# EAGLE board mainboard (EAGLE 5.06)
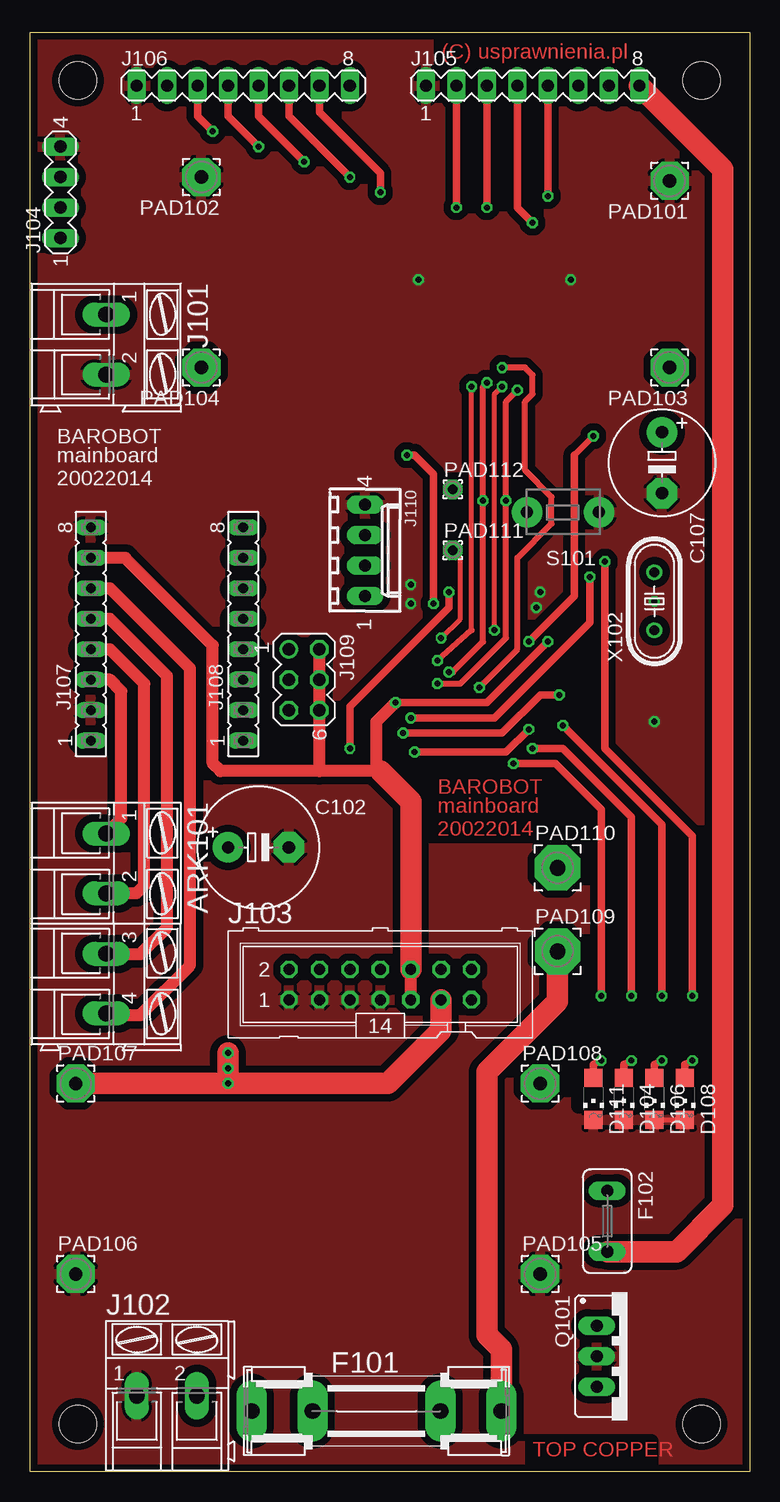
[diagram p0: board, top side]
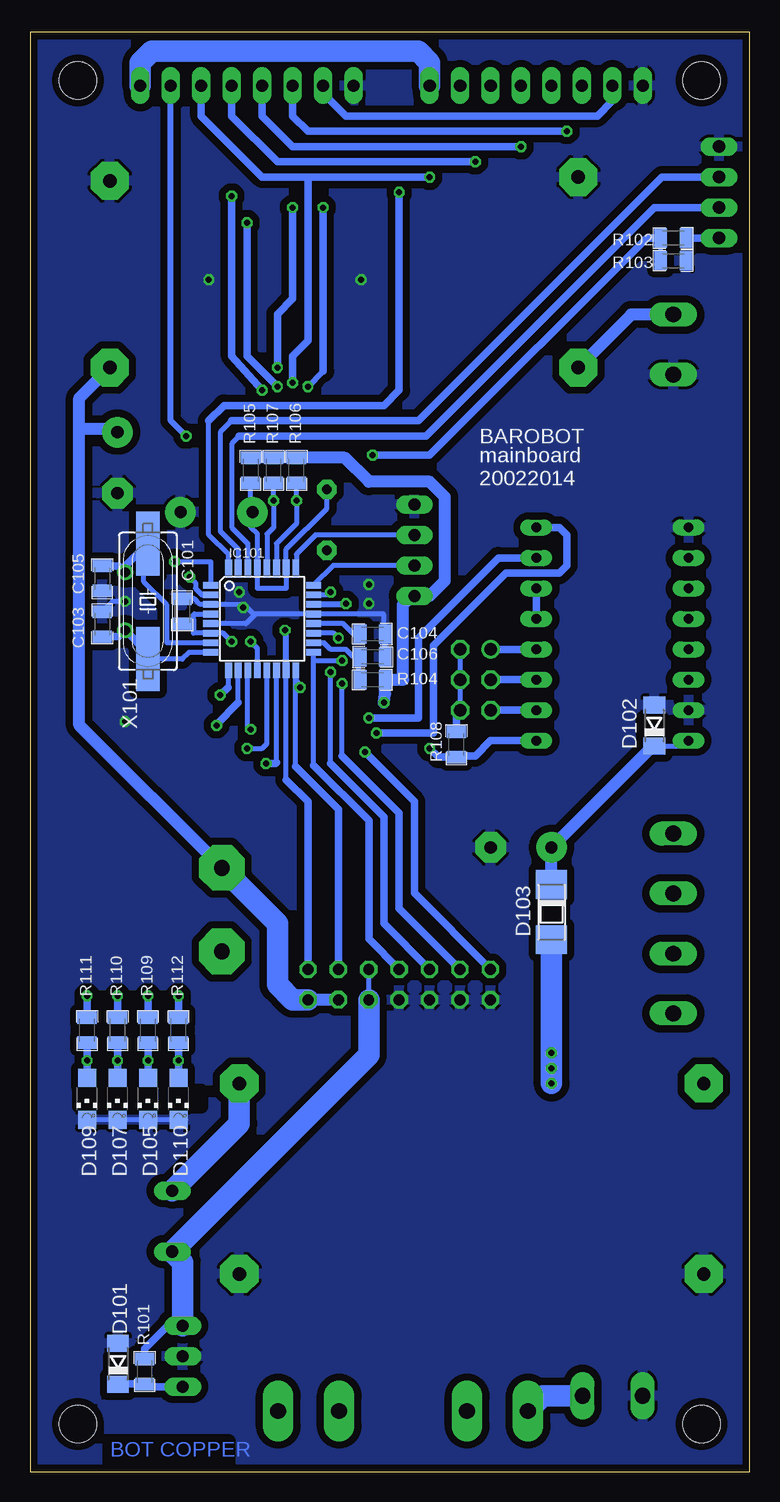
[diagram p1: board, bottom side, seen from below]

Size 60 x 120 mm. Coordinates in mm from the lower left corner, seen from the top.
Outline: 0,0 0,120 60,120 60,0 0,0
Copper layers (1*16): Top 0.035mm / dielectric 1.5mm / Bottom 0.035mm
Design rules "default *": minimum track width 10mil, minimum drill 0.5mm, track to track 8mil, track to pad 8mil, pad to pad 8mil, via to via 8mil, smd to smd 8mil, copper to edge 20mil, drill to drill 8mil, minimum pad ring 10mil, minimum via ring 8mil, stop-mask expansion 4mil, vias tented up to drill 0mil, thermal gap 10mil
Holes 3.1 mm at 4,4 56,4 56,116 4,116
tRestrict: area 45.7,30.5 to 55.9,31.8
bRestrict: area 45.7,30.5 to 55.9,31.8; area 7.3,61.6 to 8.9,62.9; area 15.6,46 to 17.8,47.3; area 52,8.7 to 53.3,9.7

## Footprints (pad centres in the part's own frame; a part is rotated, then mirrored left to right if it is on the bottom)
AK300/4 = drill 1.321 long: 1 -7.493,0; 2 -2.515,0; 3 2.515,0; 4 7.493,0
0805 = smd 1.044 x 1.6: 1 -1.048,0; 2 1.048,0
E5-10,5 = drill 1.016 pad 2.54 round: + -2.54,0 | drill 1.016 pad 2.54 octagon: - 2.54,0
E5-8,5 = drill 1.016 pad 2.54 round: + -2.54,0 | drill 1.016 pad 2.54 octagon: - 2.54,0
SOD80C = smd 1.4 x 1.8: A 1.7,0; C -1.7,0
SOD106A = smd 2.4 x 2.6: A 2.3,0; K -2.3,0
CHIPLED_1206 = smd 1.5 x 1.5: A 0,-1.75; C 0,1.75
SHK20L = drill 1.321 pad 2.54 long: 1A -10.414,0; 1B -5.334,0; 2A 10.414,0; 2B 5.334,0
TE5 = drill 1.016 long: 1 -2.54,0; 2 2.54,0
TQFP32-08 = smd 1.27 x 0.559: 1 -4.293,2.8; 2 -4.293,2; 3 -4.293,1.2; 4 -4.293,0.4; 5 -4.293,-0.4; 6 -4.293,-1.2; 7 -4.293,-2; 8 -4.293,-2.8; 17 4.293,-2.8; 18 4.293,-2; 19 4.293,-1.2; 20 4.293,-0.4; 21 4.293,0.4; 22 4.293,1.2; 23 4.293,2; 24 4.293,2.8 | smd 0.559 x 1.27: 9 -2.8,-4.293; 10 -2,-4.293; 11 -1.2,-4.293; 12 -0.4,-4.293; 13 0.4,-4.293; 14 1.2,-4.293; 15 2,-4.293; 16 2.8,-4.293; 25 2.8,4.293; 26 2,4.293; 27 1.2,4.293; 28 0.4,4.293; 29 -0.4,4.293; 30 -1.2,4.293; 31 -2,4.293; 32 -2.8,4.293
AK300/2 = drill 1.321 long: 1 -2.515,0; 2 2.489,0
ML14 = drill 0.914 octagon: 1 -7.62,-1.27; 2 -7.62,1.27; 3 -5.08,-1.27; 4 -5.08,1.27; 5 -2.54,-1.27; 6 -2.54,1.27; 7 0,-1.27; 8 0,1.27; 9 2.54,-1.27; 10 2.54,1.27; 11 5.08,-1.27; 12 5.08,1.27; 13 7.62,-1.27; 14 7.62,1.27
MA04-1 = drill 1.016 long: 1 -3.81,0; 2 -1.27,0; 3 1.27,0; 4 3.81,0
MA08-1 = drill 1.016 long: 1 -8.89,0; 2 -6.35,0; 3 -3.81,0; 4 -1.27,0; 5 1.27,0; 6 3.81,0; 7 6.35,0; 8 8.89,0
FE08 = drill 0.813 long: 1 -8.89,0; 2 -6.35,0; 3 -3.81,0; 4 -1.27,0; 5 1.27,0; 6 3.81,0; 7 6.35,0; 8 8.89,0
MA03-2 = drill 1.016 round: 1 -2.54,-1.27 | drill 1.016 octagon: 2 -2.54,1.27; 3 0,-1.27; 4 0,1.27; 5 2.54,-1.27; 6 2.54,1.27
6410-04 = drill 1.016 long: 1 3.81,0; 2 1.27,0; 3 -1.27,0; 4 -3.81,0
3,17/1,1 = drill 1.118 pad 3.175 octagon: 1 0,0
3,81/1,3 = drill 1.321 pad 3.81 octagon: 1 0,0
1,6/0,8 = drill 0.813 pad 1.6 octagon: 1 0,0
TO220CS = drill 1.016 long: A 0,-2.54; C -2.54,-2.54; G 2.54,-2.54
NSWITCH = drill 1.016 pad 2.54 round: 1 -3,0; 2 3,0
HC49UP = smd 5.334 x 1.93: 1 -4.826,0; 2 4.826,0
HC49/S = drill 0.813 round: 1 -2.413,0; 2 2.413,0

## Placement (x,y rotation side)
ARK101  [AK300/4]  6.35,45.72 270 top
C101  100n  [0805]  47.31,71.75 270 bottom
C102  100uF  [E5-10,5]  19.05,52.07 0 top
C103  27p  [0805]  53.98,70.67 270 bottom
C104  100n  [0805]  31.43,69.85 180 bottom
C105  27p  [0805]  53.98,74.48 90 bottom
C106  100n  [0805]  31.43,67.94 0 bottom
C107  [E5-8,5]  52.7,84.14 270 top
D101  C5V6  [SOD80C]  52.66,9.02 90 bottom
D102  C16  [SOD80C]  7.94,62.23 90 bottom
D103  SS34  [SOD106A]  16.51,46.67 270 bottom
D104  YELLOW  [CHIPLED_1206]  49.53,31.11 180 top
D105  YELLOW  [CHIPLED_1206]  50.16,31.11 180 bottom
D106  GREEN  [CHIPLED_1206]  52.07,31.11 180 top
D107  GREEN  [CHIPLED_1206]  52.7,31.11 180 bottom
D108  WHITE  [CHIPLED_1206]  54.61,31.11 180 top
D109  WHITE  [CHIPLED_1206]  55.24,31.11 180 bottom
D110  RED  [CHIPLED_1206]  47.62,31.11 180 bottom
D111  RED  [CHIPLED_1206]  46.99,31.11 180 top
F101  FUSESHK20L  [SHK20L]  28.89,5.08 0 top
F102  [TE5]  48.13,20.91 270 top
IC101  ATMEGA328  [TQFP32-08]  40.64,71.12 0 bottom
J101  [AK300/2]  6.35,93.98 270 top
J102  [AK300/2]  11.43,6.35 0 top
J103  [ML14]  29.21,40.64 0 top
J104  [MA04-1]  2.54,106.68 90 top
J105  [MA08-1]  41.91,115.57 0 top
J106  [MA08-1]  17.78,115.57 0 top
J107  [FE08]  5.08,69.85 90 top
J108  [FE08]  17.78,69.85 90 top
J109  [MA03-2]  22.86,66.04 270 top
J110  22-27-2041-04  [6410-04]  27.94,76.83 270 top
PAD101  [3,17/1,1]  53.34,107.63 180 top
PAD102  [3,17/1,1]  14.29,107.95 180 top
PAD103  [3,17/1,1]  53.34,92.08 180 top
PAD104  [3,17/1,1]  14.29,92.08 180 top
PAD105  [3,17/1,1]  42.55,16.51 0 top
PAD106  [3,17/1,1]  3.81,16.51 0 top
PAD107  [3,17/1,1]  3.81,32.38 0 top
PAD108  [3,17/1,1]  42.55,32.38 0 top
PAD109  [3,81/1,3]  44,43.4 0 top
PAD110  [3,81/1,3]  44,50.36 0 top
PAD111  [1,6/0,8]  35.24,76.83 0 top
PAD112  [1,6/0,8]  35.24,81.92 0 top
Q101  BTW58  [TO220CS]  49.8,9.65 270 top
R101  1k  [0805]  50.44,8.38 90 bottom
R102  8k2  [0805]  6.35,102.87 180 bottom
R103  8k2  [0805]  6.35,100.97 180 bottom
R104  82R  [0805]  31.43,66.04 180 bottom
R105  8k2  [0805]  41.59,83.5 90 bottom
R106  8k2  [0805]  37.78,83.5 90 bottom
R107  8k2  [0805]  39.69,83.5 90 bottom
R108  8k2  [0805]  24.45,60.64 90 bottom
R109  470R  [0805]  50.16,36.83 90 bottom
R110  470R  [0805]  52.7,36.83 90 bottom
R111  470R  [0805]  55.24,36.83 90 bottom
R112  470R  [0805]  47.62,36.83 90 bottom
S101  [NSWITCH]  44.45,80.01 180 top
X101  16MHz  [HC49UP]  50.16,72.58 90 bottom
X102  16MHz  [HC49/S]  52.07,72.58 90 top

## Library data of the parts
ARK101 J101 J102 = con-ptr500
C101 C103-C106 R101-R112 = barobot
C102 C107 = rcl
D101 D102 = diode
D103 = telefunken
D104-D111 = led
F101 F102 = fuse
IC101 = atmel
J103 = con-ml
J104-J106 J109 = con-lstb
J107 J108 = con-lsta
J110 = con-molex
PAD101-PAD112 = wirepad
Q101 = triac
S101 = aaaa
X101 X102 = crystal

## Nets
+12V: C107.+ D103.A J103.11 J103.13 PAD103.1 PAD107.1 PAD110.1
CARRET_RESET: IC101.11 J103.2
GND: C101.1 C102.- C103.1 C104.1 C105.1 C106.2 C107.- D101.A D102.A D104.C D105.C D106.C D107.C D108.C D109.C D110.C D111.C IC101.3 IC101.5 IC101.21 J101.2 J102.1 J103.1 J103.3 J103.5 J103.7 J104.4 J105.1 J106.1 J107.2 J107.8 J110.4 PAD101.1 PAD102.1 PAD105.1 PAD106.1 Q101.A R103.1 S101.1
JUMPER101: IC101.23 J108.1 R108.1
MISO: IC101.16 J103.12 J105.3 J106.3
MOSI: IC101.15 J103.14 J105.4 J106.4
N$1: F101.2A PAD109.1
N$2: IC101.24 J110.2
N$3: IC101.12 J105.7
N$4: IC101.30 J104.2
N$5: IC101.31 J104.3
N$6: J101.1 PAD104.1
N$7: J104.1 R102.1
N$8: IC101.1 R111.2
N$9: IC101.10 R110.2
N$10: IC101.13 R109.2
N$11: IC101.14 R112.2
N$12: D110.A D111.A R112.1
N$13: D108.A D109.A R111.1
N$14: IC101.25 J110.3
N$15: D104.A D105.A R109.1
N$16: F101.1A J102.2
N$17: ARK101.1 J107.3
N$18: ARK101.2 J107.4
N$19: ARK101.3 J107.5
N$20: ARK101.4 J107.6
N$21: IC101.19 PAD111.1
N$24: J108.5 J108.6
N$25: IC101.2 J108.7
N$26: IC101.9 J108.8
N$27: C105.2 IC101.7 X101.2 X102.2
N$28: IC101.26 IC101.29 PAD112.1 R105.1 S101.2
N$35: J108.2 J109.5
N$37: IC101.22 R102.2 R103.2
N$38: IC101.32 J106.7
N$39: J108.3 J109.3
N$40: J108.4 J109.1
N$41: C103.2 IC101.8 X101.1 X102.1
N$42: C104.2 IC101.20
N$43: C102.+ D102.C D103.K J107.1
N$45: C106.1 IC101.18 R104.2
N$47: D101.C Q101.G R101.1
N$48: F102.1 PAD108.1
R103: D106.A D107.A R110.1
SCK: IC101.17 J103.8 J105.2 J106.2
SCL: IC101.28 J103.4 J105.5 J106.5 R107.1
SDA: IC101.27 J103.6 J105.6 J106.6 R106.1
VCC: C101.2 F102.2 IC101.4 IC101.6 J103.9 J103.10 J105.8 J106.8 J107.7 J109.2 J109.4 J109.6 J110.1 Q101.C R101.2 R104.1 R105.2 R106.2 R107.2 R108.2

## Tracks (layer width: path | path; a pad name or v marks a point on that pad's centre or on a via)
+12V  (via drill 0.5)
  Top 1.778: J103.11 34.29,36.83 29.84,32.38 v16.51,32.38 | PAD107.1 v16.51,32.38 | v16.51,32.38 v16.51,33.66 16.51,34.29 v16.51,34.92
  Bottom 1.016: J103.11 J103.13 | 55.88,87 55.88,89.53 PAD103.1 | C107.+ 53.02,87 55.88,87 | 55.88,87 55.88,62.24 PAD110.1 | PAD110.1
  Bottom 1.778: v16.51,32.38 D103.A | J103.13 38.1,39.37 39.37,40.64 39.37,45.73 PAD110.1
CARRET_RESET  (via drill 0.5)
  Top 0.61: v41.59,61.91 39.69,60.01 v32.07,60.01
  Bottom 0.406: IC101.11 41.84,62.16 v41.59,61.91
  Bottom 0.61: J103.2 27.94,48.26 27.94,55.88 v32.07,60.01
GND  (via drill 0.5)
  Top 0.406: v52.07,72.58 51.75,72.58 | D106.C D108.C
  Bottom 0.406: IC101.5 41.99,70.72 41.27,71.44 | 41.27,71.44 41.19,71.52 IC101.21 30.56,71.52 30.48,71.44 30.48,69.94 C104.1 | 41.27,71.44 42.16,72.32 IC101.3 45.81,72.32 46.29,72.8 C101.1 | C106.2 C104.1 | C104.1 | C103.1 53.12,72.58 v52.07,72.58 | D109.C D107.C D105.C | D110.C D104.C | D104.C D105.C | D110.C D111.C D110.C | D104.C D105.C
  other vias: 42.55,73.34 32.38,99.38 42.23,72.07 31.75,73.98 31.75,72.39 52.07,62.55 45.09,99.38
  pour Top (isolate 0.61): 0,119.38 59.69,119.38 59.69,0 0,0
  pour Bottom (isolate 0.61): 0,119.38 59.69,119.38 59.69,0 0,0
JUMPER101  (via drill 0.5)
  Top 0.61: v34.92,73.34 34.92,72.07 26.67,63.82 v26.67,60.33
  Bottom 0.406: IC101.23 34.92,73.12 v34.92,73.34
  Bottom 0.61: J108.1 21.59,60.96 22.86,59.69 24.35,59.69 R108.1 25.94,59.59 v26.67,60.33
MISO  (via drill 0.5)
  Top 0.508: v37.47,65.41 40.64,68.58 40.64,76.2 43.5,79.06 43.5,81.28 41.27,83.5 41.27,89.22 41.91,89.85 41.91,91.44 41.27,92.08 v39.37,92.08
  Top 0.61: J106.3 13.97,113.03 v15.24,111.76 | v38.1,105.41 J105.3
  Bottom 0.406: 37.84,58.8 IC101.16
  Bottom 0.508: IC101.16 37.84,66.1 v37.47,65.41
  Bottom 0.61: J103.12 34.29,55.24 37.84,58.8 | J105.3 38.1,113.03 36.83,111.76 v15.24,111.76 | v39.37,92.08 39.37,96.52 38.1,97.79 v38.1,105.41
MOSI  (via drill 0.5)
  Top 0.406: v38.73,70.17 38.73,89.85 v39.37,90.49
  Top 0.61: J106.4 16.51,113.03 v19.05,110.49 | v41.91,104.14 40.64,105.41 J105.4
  Bottom 0.406: 38.64,57.69 IC101.15
  Bottom 0.508: IC101.15 38.64,70.07 v38.73,70.17
  Bottom 0.61: 38.64,57.69 36.83,55.88 36.83,44.45 J103.14 | J105.4 40.64,113.03 38.1,110.49 v19.05,110.49 | v39.37,90.49 41.91,93.03 v41.91,104.14
N$1
  Top 1.778: F101.2A 39.31,10.22 38.1,11.43 38.1,33.34 43.99,39.23 PAD109.1
N$2
  Bottom 0.406: IC101.24 34.7,75.56 J110.2
N$3  (via drill 0.5)
  Top 0.508: 45.4,84.77 v46.99,86.36
  Top 0.61: v41.59,69.22 45.4,73.03 45.4,75.56 45.4,84.77
  Bottom 0.406: v41.59,69.22 41.04,68.66 IC101.12
  Bottom 0.508: J105.7 48.26,87.63 v46.99,86.36
N$4
  Bottom 0.406: IC101.30 41.84,77.4 43.18,78.74 43.18,85.72 42.55,86.36
  Bottom 0.61: 42.55,86.36 28.26,86.36 26.99,86.36 7.94,105.41 J104.2
N$5
  Bottom 0.406: 43.18,87.63 44.13,86.68 44.13,78.42 42.64,76.93 IC101.31
  Bottom 0.61: J104.3 7.3,107.95 27.62,87.63 43.18,87.63
N$6
  Bottom 1.016: PAD104.1 9.87,96.5 J101.1
  Bottom 1.27: PAD104.1 13.65,92.71
N$7
  Bottom 0.406: 5.08,102.87 R102.1
  Bottom 0.61: J104.1 5.08,102.87
N$8  (via drill 0.5)
  Top 0.61: v47.94,75.88 47.94,60.33 55.24,53.02 v55.24,39.69
  Bottom 0.406: 44.93,73.98 IC101.1 44.93,75.88 v47.94,75.88
  Bottom 0.61: R111.2 v55.24,39.69
N$9  (via drill 0.5)
  Top 0.61: v44.45,62.23 52.7,53.98 v52.7,39.69
  Bottom 0.406: 42.64,64.14 IC101.10
  Bottom 0.61: 42.64,64.14 44.45,62.33 v44.45,62.23 | R110.2 v52.7,39.69
N$10  (via drill 0.5)
  Top 0.61: v41.91,60.33 44.45,60.33 50.16,54.61 v50.16,39.69
  Bottom 0.406: IC101.13 40.24,60.73 40.64,60.33 v41.91,60.33
  Bottom 0.61: R109.2 v50.16,39.69
N$11  (via drill 0.5)
  Top 0.61: v47.62,39.69 47.62,49.85 | 47.62,49.85 47.62,50.16 | v40.32,59.05 43.81,59.05 47.62,55.24 47.62,49.85
  Bottom 0.406: 39.44,59.12 IC101.14
  Bottom 0.61: R112.2 v47.62,39.69 | 39.44,59.12 39.51,59.05 v40.32,59.05
N$12  (via drill 0.5)
  Top 0.61: v47.62,34.29 46.99,33.97 D111.A
  Bottom 0.61: R112.1 v47.62,34.29 D110.A
N$13  (via drill 0.5)
  Top 0.61: v55.24,34.29 54.61,33.97 D108.A
  Bottom 0.61: R111.1 v55.24,34.29 D109.A
N$14
  Bottom 0.406: J110.3 36.2,78.11 37.78,76.52 37.78,75.47 IC101.25
N$15  (via drill 0.5)
  Top 0.61: v50.16,34.29 49.53,33.97 D104.A
  Bottom 0.61: R109.1 v50.16,34.29 D105.A
N$16
  Bottom 1.778: J102.2 17.21,6.35 F101.1A
N$17
  Top 1.016: ARK101.1 7.62,54.48 7.62,65.09 6.67,66.04 J107.3
N$18
  Top 1.016: J107.4 6.67,68.58 9.53,65.72 9.53,48.9 8.89,48.26 6.38,48.26 ARK101.2
N$19
  Top 1.016: J107.5 6.67,71.12 11.43,66.36 11.43,45.4 9.21,43.18 6.38,43.18 ARK101.3
N$20
  Top 1.016: J107.6 6.67,73.66 13.34,66.99 13.34,42.23 9.21,38.1 6.22,38.1 | 6.22,38.1 5.71,38.1 | ARK101.4 6.22,38.1
N$21  (via drill 0.5)
  Top 0.406: v34.29,69.53 35.88,71.12 35.88,76.2 PAD111.1
  Bottom 0.406: IC101.19 34.68,69.92 v34.29,69.53
N$24
  Bottom 0.61: J108.5 J108.6
N$25  (via drill 0.5)
  Top 0.61: v31.75,62.87 38.73,62.87 46.67,70.8 v46.67,74.61
  Bottom 0.406: IC101.2 45.66,73.12 46.2,73.66 46.2,74.14 v46.67,74.61
  Bottom 0.61: v31.75,62.87 27.62,62.87 27.62,69.53 20.95,76.2 J108.7
N$26  (via drill 0.5)
  Top 0.61: v44.13,64.77 42.55,64.77 39.37,61.59 v31.11,61.59
  Bottom 0.406: IC101.9 43.44,65.46 43.5,65.41 43.81,65.09
  Bottom 0.61: v31.11,61.59 26.35,61.59 26.35,68.9 20.32,74.93 15.88,74.93 15.24,75.56 15.24,78.11 15.88,78.74 J108.8 | v44.13,64.77 43.5,65.41
N$27
  Bottom 0.406: 52.61,75.53 52.45,75.37 52.2,75.37 | X101.2 50.51,77.06 50.51,74.2 48.58,72.26 48.58,69.12 IC101.7
  Bottom 0.61: 52.45,75.37 X102.2 | 52.61,75.53 C105.2 | 50.51,77.06 52.2,75.37
N$28
  Bottom 0.406: 41.59,80.01 41.59,78.74 41.04,78.19 IC101.29 41.04,73.66 38.64,73.66 IC101.26 38.64,76.93 35.24,80.33 PAD112.1 | 41.59,80.01 R105.1 | 41.59,80.01 S101.2
N$35
  Bottom 0.61: J108.2 J109.5
N$37  (via drill 0.5)
  Top 0.61: v31.43,84.77 32.07,84.77 33.66,83.19 v33.66,72.39
  Bottom 0.406: R103.2 R102.2
  Bottom 0.508: IC101.22 34.04,72.32 v33.66,72.39
  Bottom 0.61: v31.43,84.77 26.67,84.77 8.57,102.87 R102.2
N$38  (via drill 0.5)
  Top 0.61: J106.7 24.13,113.35 29.21,108.27 v29.21,106.68
  Bottom 0.406: IC101.32 43.44,76.46 45.09,78.11 45.09,87.63
  Bottom 0.61: 45.09,87.63 43.81,88.9 30.48,88.9 29.21,90.17 v29.21,106.68
N$39
  Bottom 0.61: J108.3 J109.3
N$40
  Bottom 0.61: J108.4 J109.1
N$41
  Bottom 0.406: 49.85,68.45 49.85,68.07 X101.1 | X101.1 50.16,68.26 50.26,68.36 50.16,68.45 | X102.1 52.61,69.63 | IC101.8 46.73,68.32 47.3,67.75 X101.1
  Bottom 0.61: 50.26,68.36 X102.1 | 52.61,69.63 C103.2
N$42
  Bottom 0.406: IC101.20 33.89,70.72 33.02,69.85 C104.2
N$43
  Bottom 0.406: J107.1 5.51,60.53 D102.C
  Bottom 1.016: D103.K C102.+ 8.05,60.53 D102.C
N$45
  Bottom 0.406: R104.2 32.8,67.94 C106.1 33.02,67.94 33.66,68.58 34.92,68.58 35.47,69.12 IC101.18
N$47
  Bottom 0.61: Q101.G 50.21,7.11 R101.1 52.64,7.33 D101.C
N$48
  Bottom 1.778: PAD108.1 42.55,29.04 F102.1
R103  (via drill 0.5)
  Top 0.61: v52.7,34.29 52.07,33.97 D106.A
  Bottom 0.61: R110.1 v52.7,34.29 D107.A
SCK  (via drill 0.5)
  Top 0.406: 36.83,70.17 v36.83,90.49
  Top 0.508: v33.97,67.63 36.83,70.17
  Top 0.61: v35.56,105.41 J105.2
  Bottom 0.406: 36.35,58.89 36.35,67.63 | 36.35,67.63 IC101.17 | 36.35,67.63 v33.97,67.63
  Bottom 0.508: v36.83,90.49 35.56,91.76
  Bottom 0.61: J106.2 11.43,114.3 12.7,113.03 33.66,113.03 35.56,114.94 J105.2 | 35.56,91.76 v35.56,105.41 | 36.35,58.89 31.75,54.29 31.75,44.45 J103.8
SCL  (via drill 0.5)
  Top 0.508: v33.97,65.72 35.88,65.72 39.69,69.53 v39.69,80.96 39.69,89.22 v40.64,90.17
  Top 0.61: J106.5 19.05,113.03 v22.86,109.22 | v43.18,106.36 J105.5
  Bottom 0.406: 33.97,59.69 v33.97,65.72 | IC101.28 40.24,78.19 39.69,78.74 v39.69,80.96 R107.1
  Bottom 0.61: J105.5 43.18,113.03 39.37,109.22 v22.86,109.22 | v40.64,90.17 43.18,93.03 v43.18,106.36 | J103.4 29.21,46.99 29.21,54.93 33.97,59.69
SDA  (via drill 0.5)
  Top 0.508: v38.1,90.81 37.78,90.49 v37.78,80.96 37.78,69.22 35.24,66.67
  Top 0.61: J106.6 21.59,113.03 v26.67,107.95 | v34.92,66.67 35.24,66.67
  Bottom 0.406: 34.92,59.05 v34.92,66.67 | IC101.27 39.44,77.4 37.78,79.06 v37.78,80.96 R106.1
  Bottom 0.61: J105.6 45.72,113.03 40.64,107.95 36.83,107.95 | 36.83,107.95 v26.67,107.95 | v38.1,90.81 38.1,93.03 36.83,94.3 36.83,107.95 | J103.6 30.48,45.72 30.48,54.61 34.92,59.05
VCC  (via drill 0.5)
  Top 0.61: v43.18,69.22 38.1,64.14 v30.48,64.14 | 29.53,58.1 29.21,58.42 28.89,58.74
  Top 1.016: J103.9 J103.10 | v30.48,64.14 28.89,62.55 28.89,58.74 | J107.7 7.94,76.2 15.24,68.9 15.24,59.05 15.88,58.42 24.13,58.42 | 29.21,58.42 24.13,58.42 | 24.13,58.42 J109.2
  Top 1.778: J105.8 57.78,108.58 57.78,22.23 53.93,18.37 F102.2 | 29.21,58.42 31.75,55.88 J103.10
  Bottom 0.406: IC101.4 46.27,71.52 46.35,71.44 46.35,71.12 | 46.35,71.12 46.35,70.17 | J109.6 J109.4 J109.2 | J103.9 J103.10 | v43.18,69.22 43.88,69.92 IC101.6 46.35,69.92 46.35,71.12 | R106.2 R107.2 R105.2 | C101.2 46.77,70.71 46.35,71.12
  Bottom 0.61: R101.2 50.44,10.29 48.53,12.19 Q101.C | R108.2 24.45,63.18 J109.6
  Bottom 1.016: R105.2 33.75,84.55 31.75,82.55 26.67,82.55 25.4,81.28 25.4,74.3 26.67,73.03 J110.1 28.89,72.39 28.89,66.04 R104.1 30.39,64.86 v30.48,64.14
  Bottom 1.778: J105.8 50.8,117.47 49.85,118.43 27.62,118.43 26.67,117.47 J106.8 | Q101.C 47.26,17.49 F102.2 31.75,34.75 J103.9

## Text on the board
Top: (C) usprawnienia.pl | BAROBOT | mainboard | 20022014 | TOP COPPER
Bottom: BOT COPPER
tPlace: BAROBOT | mainboard | 20022014
bPlace: BAROBOT | mainboard | 20022014
Uwagi: RESET